# EAGLE board i-uC (EAGLE 5.07)
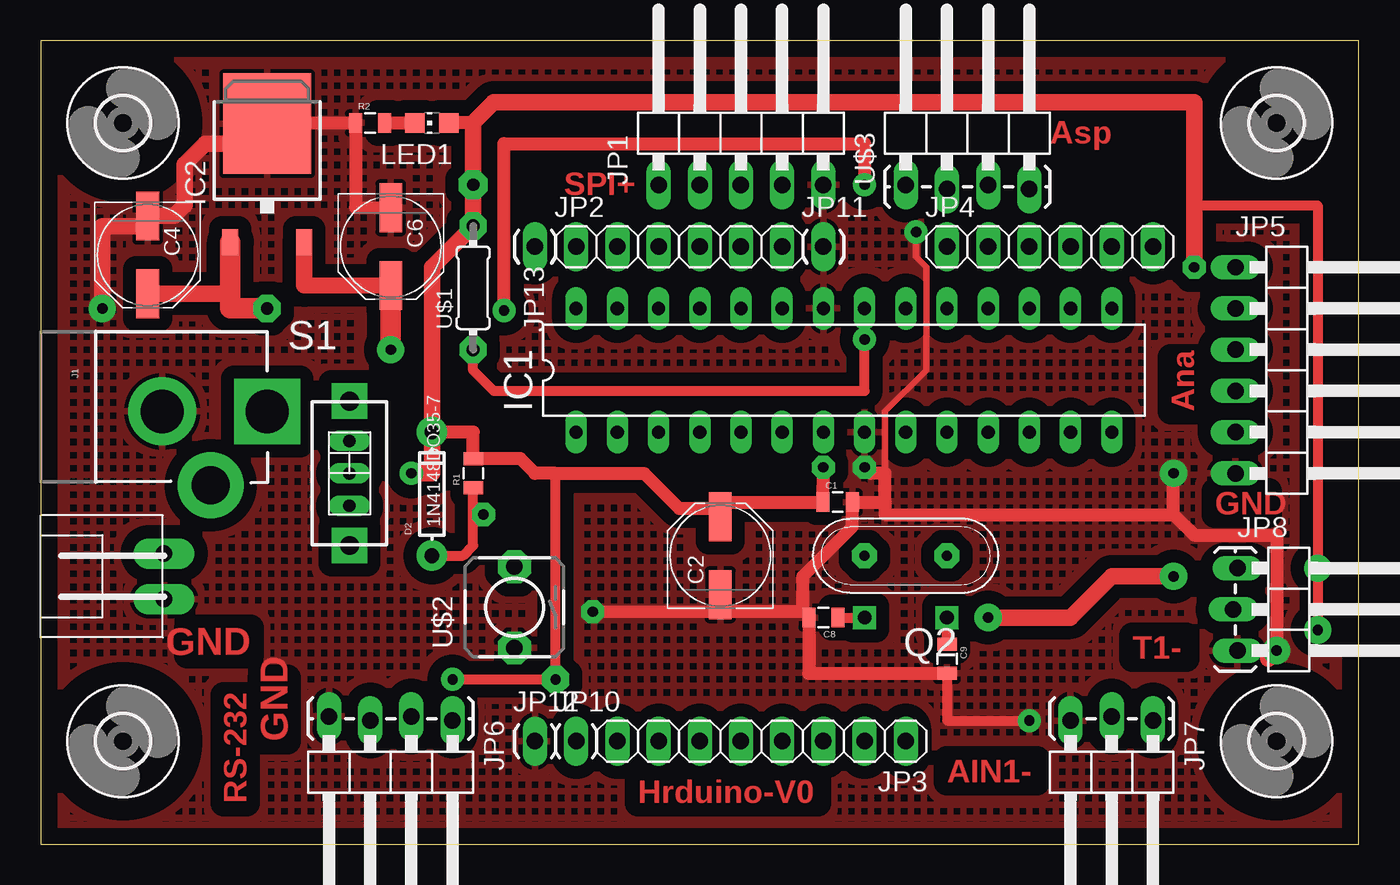
[diagram p0: board, top side]
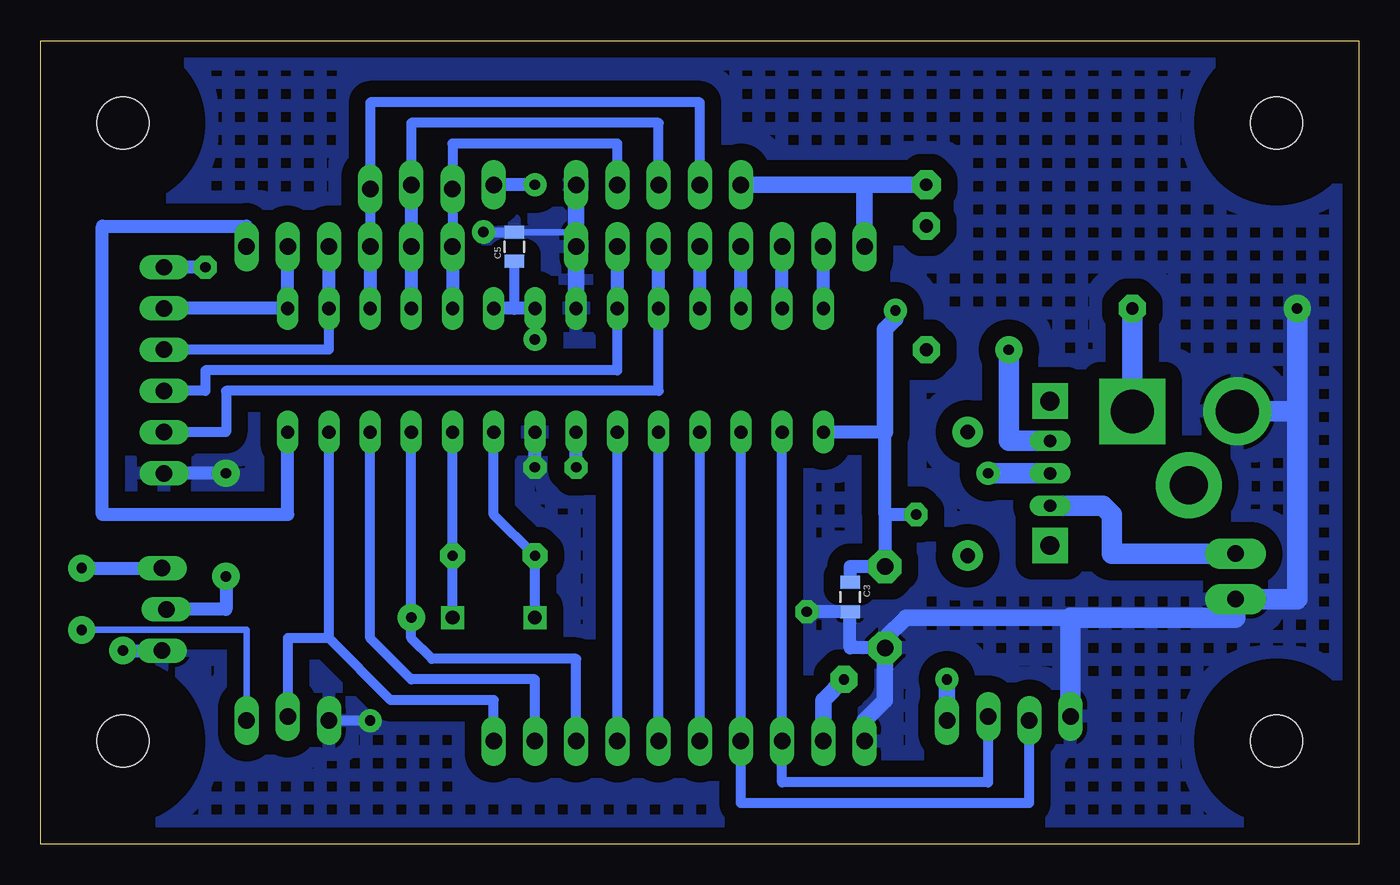
[diagram p1: board, bottom side, seen from below]

Size 81.28 x 49.53 mm. Coordinates in mm from the lower left corner, seen from the top.
Outline: 0,0 81.28,0 81.28,49.53 0,49.53 0,0
Copper layers (1*16): Top 0.035mm / dielectric 1.5mm / Bottom 0.035mm
Design rules "default": minimum track width 10mil, minimum drill 24mil, track to track 8mil, track to pad 8mil, pad to pad 8mil, via to via 8mil, smd to smd 8mil, copper to edge 40mil, drill to drill 8mil, minimum pad ring 10mil, minimum via ring 8mil, stop-mask expansion 4mil, vias tented up to drill 0mil, thermal gap 10mil

## Footprints (pad centres in the part's own frame; a part is rotated, then mirrored left to right if it is on the bottom)
0805 = smd 0.8 x 1.2: 1 -0.9,0; 2 0.9,0
PANASONIC_D = smd 3 x 1.4: + 2.4,0; - -2.4,0
DIODE-1N4148 = drill 0.9 pad 1.88 round: A -3.81,0; C 3.81,0
3,2 = hole 3.2: 0,0
DIL28-3 = drill 0.813 long: 1 -16.51,-3.81; 2 -13.97,-3.81; 3 -11.43,-3.81; 4 -8.89,-3.81; 5 -6.35,-3.81; 6 -3.81,-3.81; 7 -1.27,-3.81; 8 1.27,-3.81; 9 3.81,-3.81; 10 6.35,-3.81; 11 8.89,-3.81; 12 11.43,-3.81; 13 13.97,-3.81; 14 16.51,-3.81; 15 16.51,3.81; 16 13.97,3.81; 17 11.43,3.81; 18 8.89,3.81; 19 6.35,3.81; 20 3.81,3.81; 21 1.27,3.81; 22 -1.27,3.81; 23 -3.81,3.81; 24 -6.35,3.81; 25 -8.89,3.81; 26 -11.43,3.81; 27 -13.97,3.81; 28 -16.51,3.81
TO252 = smd 1 x 1.6: 1 -2.28,-4.8; 2 2.28,-4.8 | smd 5.4 x 6.2: 3 0,2.5
POWER_JACK_2.1X5.5_BIG_PTH = drill 2.667 pad 4.191 round: GND 0,-0.127 | drill 2.337 pad 4.064 round: GNDBREAK 4.547,2.87 | drill 2.667 pad 4.064 square: PWR 0,6.35
1X05/90 = drill 1.016 long: 1 -5.08,-3.81; 2 -2.54,-3.81; 3 0,-3.81; 4 2.54,-3.81; 5 5.08,-3.81
1X06 = drill 1.016 long: 1 -6.35,0; 2 -3.81,0; 3 -1.27,0; 4 1.27,0; 5 3.81,0; 6 6.35,0
1X08 = drill 1.016 long: 1 -8.89,0; 2 -6.35,0; 3 -3.81,0; 4 -1.27,0; 5 1.27,0; 6 3.81,0; 7 6.35,0; 8 8.89,0
1X06/90 = drill 1.016 long: 1 -6.35,-3.81; 2 -3.81,-3.81; 3 -1.27,-3.81; 4 1.27,-3.81; 5 3.81,-3.81; 6 6.35,-3.81
1X04/90_LOCK = drill 1.016 long: 1 -3.81,-3.81; 2 -1.27,-4.064; 3 1.27,-3.81; 4 3.81,-4.064
1X03/90_LOCK = drill 1.016 long: 1 -2.54,-2.54; 2 0,-2.794; 3 2.54,-2.54
XH-1X2-LONG-LOCK = drill 1.016 pad 1.88 long: 1 -1.397,0; 2 1.397,0
1X01_LONGPAD = drill 1.016 long: 1 0,0
CHIP-LED0805 = smd 1.2 x 1.2: A 0,-1.05; C 0,1.05
XTAL = drill 0.61 pad 1.524 octagon: 1 -2.54,0; 2 2.54,0
SWITCH-SPDT-AM#6 = drill 0.762 pad 1.27 long: 1 0,2; 2 0,0; 3 0,-2 | drill 1.15 pad 2.184 square: P$1 0,-4.445; P$2 0,4.445
0204/7 = drill 0.813 pad 1.676 octagon: 1 -3.81,0; 2 3.81,0
ALPS-SKHV = drill 1.016 pad 2.032 octagon: 2 -2.51,0; 3 2.51,0

## Placement (x,y rotation side)
C1  100n  [0805]  49.15,21.08 0 top
C2  100u  [PANASONIC_D]  41.91,17.78 90 top
C3  100n  [0805]  31.37,15.24 270 bottom
C4  100u  [PANASONIC_D]  6.6,36.32 270 top
C5  104  [0805]  52.07,36.83 90 bottom
C6  100u  [PANASONIC_D]  21.59,36.83 270 top
C8  33pF  [0805]  48.26,13.97 180 top
C9  33pF  [0805]  55.88,11.43 270 top
D2  1N4148DO35-7  [DIODE-1N4148]  24.13,21.59 90 top
H1  MOUNT-HOLE3.2  [3,2]  5.08,44.45 0 top
H2  MOUNT-HOLE3.2  [3,2]  76.2,44.45 0 top
H3  MOUNT-HOLE3.2  [3,2]  76.2,6.35 0 top
H4  MOUNT-HOLE3.2  [3,2]  5.08,6.35 0 top
IC1  MEGA8-P  [DIL28-3]  49.53,29.21 0 top
IC2  7805DT  [TO252]  13.97,41.91 0 top
J1  POWER_JACKPTH_BIG  [POWER_JACK_2.1X5.5_BIG_PTH]  7.62,26.67 270 top
JP1  SPI  [1X05/90]  43.18,44.45 0 top
JP2  PORTC  [1X06]  39.37,36.83 0 top
JP3  PORTD  [1X08]  44.45,6.35 180 top
JP4  PORTB  [1X06]  62.23,36.83 0 top
JP5  ANALOG  [1X06/90]  77.47,29.21 270 top
JP6  RS-232  [1X04/90_LOCK]  21.59,3.81 180 top
JP7  AIN  [1X03/90_LOCK]  66.04,5.08 180 top
JP8  T1  [1X03/90_LOCK]  76.33,14.48 270 top
JP9  [XH-1X2-LONG-LOCK]  7.62,16.51 90 top
JP10  VCC  [1X01_LONGPAD]  33.02,6.35 0 top
JP11  GND  [1X01_LONGPAD]  48.26,36.83 0 top
JP12  GND  [1X01_LONGPAD]  30.48,6.35 0 top
JP13  VCC  [1X01_LONGPAD]  30.48,36.83 0 top
LED1  RED  [CHIP-LED0805]  24.13,44.45 90 top
Q2  12Mhz  [XTAL]  53.34,17.78 180 top
R1  10k  [0805]  26.67,22.86 90 top
R2  400R  [0805]  20.32,44.45 0 top
S1  [SWITCH-SPDT-AM#6]  19.05,22.86 0 top
U$1  10uH  [0204/7]  26.67,34.29 90 top
U$2  TACT_SWITCH-2-PTH  [ALPS-SKHV]  29.21,14.61 90 top
U$3  AVR_USBASP_41X4/90_LOCK  [1X04/90_LOCK]  57.15,44.45 0 top

## Library data of the parts
C1 C5 JP10-JP13 = SparkFun
C2-C4 C6 C8 C9 D2 J1 JP6-JP9 R1 R2 S1 U$1-U$3 = digital-toy
H1-H4 = holes
IC1 = atmel
IC2 = linear
JP1-JP5 = pinhead
LED1 = led
Q2 = yhf_spec-RF

## Nets
ADC_A: IC1.23 JP2.6 JP5.4
ADC_B: IC1.24 JP2.5 JP5.5
AIN1: IC1.13 JP3.1 JP7.2
AVCC: C5.1 IC1.20 IC1.21 U$1.1
GND: C1.2 C2.- C3.2 C4.- C5.2 C6.- C8.2 C9.2 IC1.8 IC1.22 IC2.3 J1.GND JP1.5 JP5.6 JP6.4 JP7.3 JP8.3 JP9.1 JP11.1 JP12.1 R2.1 U$2.2
MISO: IC1.18 JP1.3 JP4.2 U$3.3
MOSI: IC1.17 JP1.2 JP4.3 U$3.4
N$1: C6.+ IC2.2 S1.1
N$2: C9.1 IC1.10 Q2.1
N$3: JP9.2 S1.3
N$4: LED1.C R2.2
N$5: C4.+ IC2.1 J1.PWR
N$8: IC1.25 JP2.4
N$9: IC1.26 JP2.3
N$10: IC1.27 JP2.2
N$11: IC1.28 JP2.1
N$14: IC1.4 JP3.6
N$15: IC1.5 JP3.5
N$16: IC1.6 JP3.4
N$18: IC1.12 JP3.2
N$20: IC1.14 JP4.6
N$34: C8.1 IC1.9 Q2.2
PWM_A: IC1.15 JP4.5 JP5.2
PWM_B: IC1.16 JP4.4 JP5.3
RST: C3.1 D2.A IC1.1 R1.1 U$2.3 U$3.1
RXD: IC1.2 JP3.8 JP6.2
SCK: IC1.19 JP1.4 JP4.1 U$3.2
T1: IC1.11 JP3.3 JP8.2
TXD: IC1.3 JP3.7 JP6.3
VCC: C1.1 C2.+ D2.C IC1.7 JP1.1 JP5.1 JP6.1 JP7.1 JP8.1 JP10.1 JP13.1 LED1.A R1.2 S1.2 U$1.2

## Tracks (layer width: path | path; a pad name or v marks a point on that pad's centre or on a via)
ADC_A
  Bottom 0.61: IC1.23 45.72,29.21 71.12,29.21 71.12,27.94 JP5.4
  Bottom 0.813: IC1.23 JP2.6
ADC_B
  Bottom 0.61: IC1.24 43.18,27.94 69.85,27.94 69.85,25.4 JP5.5
  Bottom 0.813: IC1.24 JP2.5
AIN1
  Bottom 0.61: JP3.1 53.34,8.89 59.69,8.89 63.5,12.7 | 63.5,12.7 IC1.13 | JP7.2 66.04,12.7 63.5,12.7
AVCC  (via drill 0.64 pad 1.42)
  Top 0.61: v50.8,31.11 50.8,27.94 27.94,27.94 26.67,29.21 U$1.1
  Bottom 0.61: v50.8,31.11 IC1.21 | 52.07,33.02 C5.1
  Bottom 0.813: IC1.21 52.07,33.02 IC1.20
GND  (via drill 0.64 pad 1.42, 0.64 pad 1.68)
  Top 0.254: 41.91,14.35 C2.- | C8.2 46.98,14.35 46.99,14.36
  Top 0.406: 52.07,22.86 52.07,26.67 54.61,29.21 54.61,35.56 53.98,36.2 v53.98,37.73
  Top 0.61: IC2.3 12.7,45.35 | 51.17,22.86 v50.8,23.23 | v60.96,7.62 55.88,7.62 C9.2 | 6.6,38.1 C4.-
  Top 0.813: v34.04,14.33 41.91,14.35 46.98,14.35 | 51.17,22.86 52.07,22.86 52.07,21.08 | 46.99,14.36 46.99,16.51 50.05,19.57 C1.2 52.07,21.08 | C9.2 47.36,10.53 C8.2 | 69.85,20.32 v69.85,22.86 | 69.85,20.32 52.07,20.32 52.07,21.08 | 12.7,45.35 12.7,44.45 | v76.2,11.94 76.2,19.05 71.12,19.05 69.85,20.32 | IC2.3 13.97,44.45 R2.1 19.42,39.24 C6.-
  Top 1.016: v76.2,11.94 75.69,11.43 | v3.81,33.02 3.81,38.1 6.6,38.1 | C4.- 8.24,38.72 8.89,39.37 8.89,41.91 10.16,43.18 12.74,43.18 IC2.3
  Bottom 0.406: C5.2 48.63,37.73 48.26,38.1
  Bottom 0.61: v60.96,7.62 JP7.3 | v53.98,37.73 C5.2
  Bottom 0.813: v50.8,23.23 IC1.8 | v34.04,14.33 C3.2 31.37,12.1 U$2.2 29.21,12.7 | v69.85,22.86 JP5.6 | v76.2,11.94 JP8.3 | JP6.4 17.78,7.62
  Bottom 1.016: JP1.5 48.26,38.1 JP11.1 IC1.22 | 29.21,12.7 27.94,13.97 17.78,13.97 | JP12.1 30.48,7.62 29.21,8.89 U$2.2
  Bottom 1.27: JP6.4 17.78,13.97 7.62,13.97 JP9.1 3.81,15.11 3.81,26.67 | 3.81,26.67 J1.GND | 3.81,26.67 v3.81,33.02
  pour Top (isolate 0.813, hatched): 8.89,60.96 91.44,57.15 99.06,43.18 105.41,11.43 96.52,-11.43 6.35,-12.7 -11.43,5.08 -12.7,52.07
  pour Bottom (isolate 1.016, hatched): 86.36,58.42 90.17,19.05 96.52,10.16 78.74,-7.62 3.81,-7.62 -5.08,6.35 -3.81,53.34
MISO
  Bottom 0.61: JP1.3 43.18,44.45 58.42,44.45 U$3.3
  Bottom 0.813: IC1.18 JP4.2 U$3.3
MOSI
  Bottom 0.61: JP1.2 40.64,45.72 60.96,45.72 U$3.4 JP4.3
  Bottom 0.813: JP4.3 IC1.17
N$1  (via drill 0.64 pad 1.68)
  Top 1.016: IC2.2 16.26,34.44 C6.+
  Top 1.27: v21.59,30.48 C6.+
  Bottom 1.27: S1.1 21.59,24.86 v21.59,30.48
N$2  (via drill 0.84 pad 1.42)
  Top 0.61: C9.1 v55.88,13.97
  Bottom 0.61: IC1.10 Q2.1 v55.88,13.97
N$3
  Bottom 1.27: JP9.2 15.24,17.91 15.24,20.32 15.78,20.86 S1.3
N$4
  Top 0.813: R2.2 LED1.C
N$5  (via drill 0.76 pad 1.68)
  Top 0.61: 11.69,34.29 11.32,33.92
  Top 1.016: 11.32,33.92 C4.+
  Top 1.27: v13.97,33.02 11.68,33.05 11.69,34.29 IC2.1
  Bottom 1.27: J1.PWR v13.97,33.02
N$8
  Bottom 0.813: IC1.25 JP2.4
N$9
  Bottom 0.813: IC1.26 JP2.3
N$10
  Bottom 0.813: IC1.27 JP2.2
N$11
  Bottom 0.813: IC1.28 JP2.1
N$14
  Bottom 0.61: JP3.6 IC1.4
N$15
  Bottom 0.61: JP3.5 IC1.5
N$16
  Bottom 0.61: JP3.4 IC1.6
N$18
  Bottom 0.61: JP3.2 50.8,10.16 58.42,10.16 60.96,12.7 IC1.12
N$20
  Bottom 0.813: IC1.14 66.04,20.32 77.47,20.32 77.47,38.1 68.58,38.1 JP4.6
N$34  (via drill 0.84 pad 1.42)
  Top 0.61: C8.1 v50.8,13.97
  Bottom 0.61: IC1.9 53.34,20.32 Q2.2 v50.8,13.97
PWM_A
  Bottom 0.813: JP5.2 IC1.15 JP4.5
PWM_B
  Bottom 0.61: IC1.16 63.5,30.48 JP5.3
  Bottom 0.813: IC1.16 JP4.4
RST  (via drill 0.64 pad 1.42)
  Top 0.61: 26.67,20.32 v27.3,20.32 | 26.67,20.32 R1.1 | 26.67,20.32 26.67,18.41 26.04,17.78 D2.A
  Top 0.813: v28.57,32.89 28.57,43.18 50.8,43.18 v50.8,40.64
  Bottom 0.813: v50.8,40.64 U$3.1 | 29.21,20.32 U$2.3 31.37,17.11 C3.1 | 29.21,20.32 29.21,25.4 IC1.1 | v27.3,20.32 29.21,20.32
  Bottom 1.016: v28.57,32.89 28.57,32.38 29.21,31.75 29.21,25.4
RXD
  Bottom 0.61: IC1.2 JP3.8 35.56,3.81 22.86,3.81 JP6.2
SCK
  Bottom 0.61: JP1.4 45.72,43.18 55.88,43.18 U$3.2 JP4.1
  Bottom 0.813: JP4.1 IC1.19
T1  (via drill 0.64 pad 1.68)
  Top 1.016: v58.42,13.97 63.5,13.97 66.04,16.51 v69.85,16.51
  Bottom 0.61: JP3.3 48.26,11.43 57.15,11.43 58.42,12.7 v58.42,13.97 IC1.11
  Bottom 0.813: JP8.2 69.85,14.48 v69.85,16.51
TXD
  Bottom 0.61: IC1.3 JP3.7 38.1,2.54 20.32,2.54 JP6.3
VCC  (via drill 0.64 pad 1.42, 0.64 pad 1.68, 0.76 pad 1.78)
  Top 0.254: 41.78,21.08 C2.+ 41.91,20.7
  Top 0.61: 39.37,20.7 39.24,20.7 | 31.75,22.86 v31.75,10.16 v25.4,10.16 | v78.74,13.21 v78.74,17.02 78.74,39.37 71.12,39.37
  Top 0.813: 41.78,21.08 C1.1 v48.26,23.23 | 41.91,20.7 39.37,20.7 37.21,22.86 31.75,22.86 30.48,22.86 29.58,23.76 R1.2 26.67,25.4 D2.C | 26.67,44.45 LED1.A
  Top 1.016: v71.12,35.56 71.12,39.37 71.12,45.72 27.94,45.72 26.67,44.45 v26.67,40.64 U$1.2 24.13,35.56 D2.C 24.13,22.86 v22.86,22.86
  Bottom 0.406: JP7.1 68.58,13.21 v78.74,13.21
  Bottom 0.813: v48.26,23.23 IC1.7 | v71.12,35.56 JP5.1 | v78.74,17.02 JP8.1
  Bottom 1.016: v26.67,40.64 30.48,40.64 | 30.48,40.64 JP1.1 | JP10.1 33.02,8.89 v31.75,10.16 | JP6.1 v25.4,10.16 | 30.48,40.64 JP13.1
  Bottom 1.27: v22.86,22.86 S1.2

## Text on the board
Top: Asp | SPI+ | Ana | GND | GND | T1- | GND | AIN1- | RS-232 | Hrduino-V0
Document: AREF | GND | PB5 | PB4 | PB3 | PB2 | PB1 | PB0 | PD7 | PD6 | PD5 | PD4 | PD3 | PD2 | PD1 | PD0 | !Reset | +3V3 | +5V | GND | GND | +Vin | PC0 | PC1 | PC2 | PC3 | PC4 | PC5